# Altium PCB PowerManagement_uC.PcbDoc
Units mm, origin at the board's own origin, x right, y up, seen from the top; angles counter-clockwise.
Board outline 84 x 107 mm, 2 copper layers (Top Layer, Bottom Layer); 10 components, 68 nets, 151 pads, 76 vias.
Unrouted connection lines stored in the file: 3.
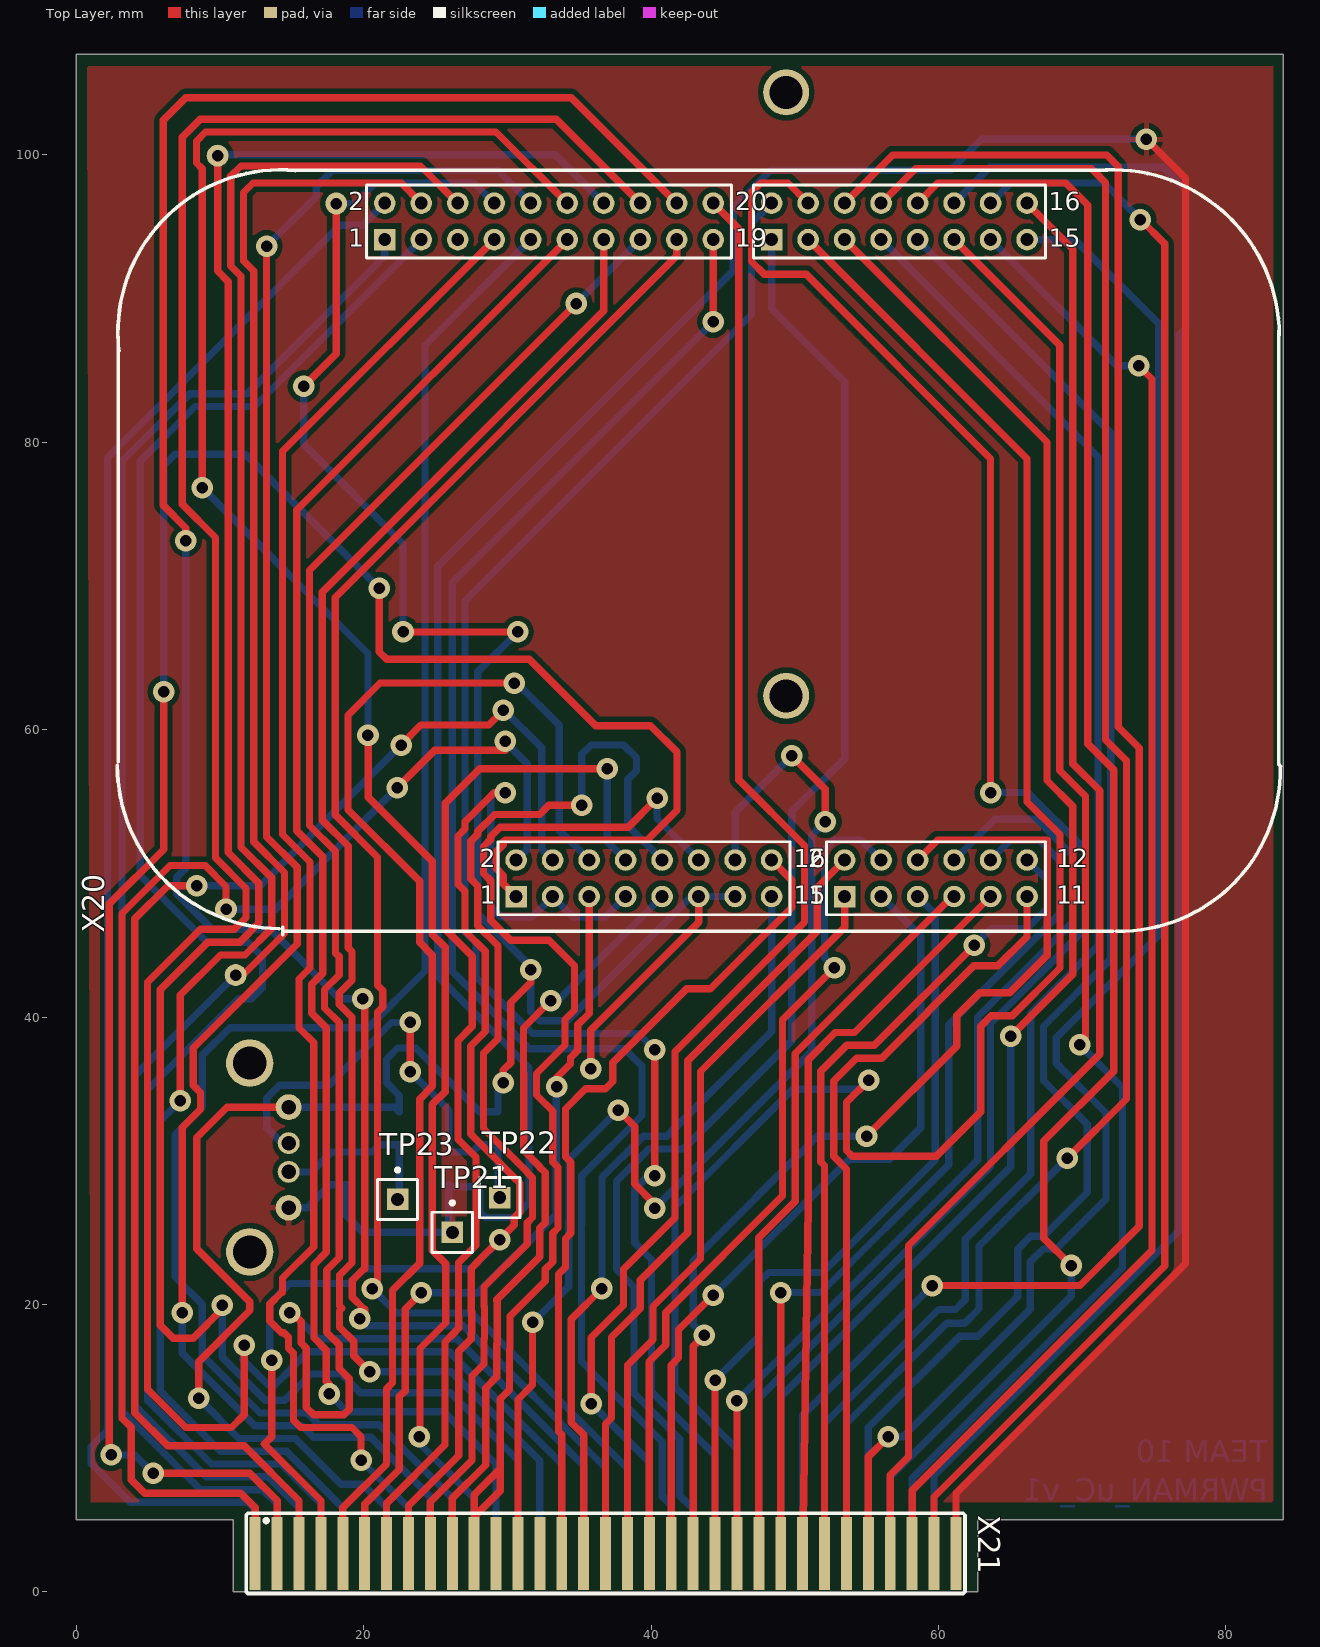
[diagram p0: Top Layer view]
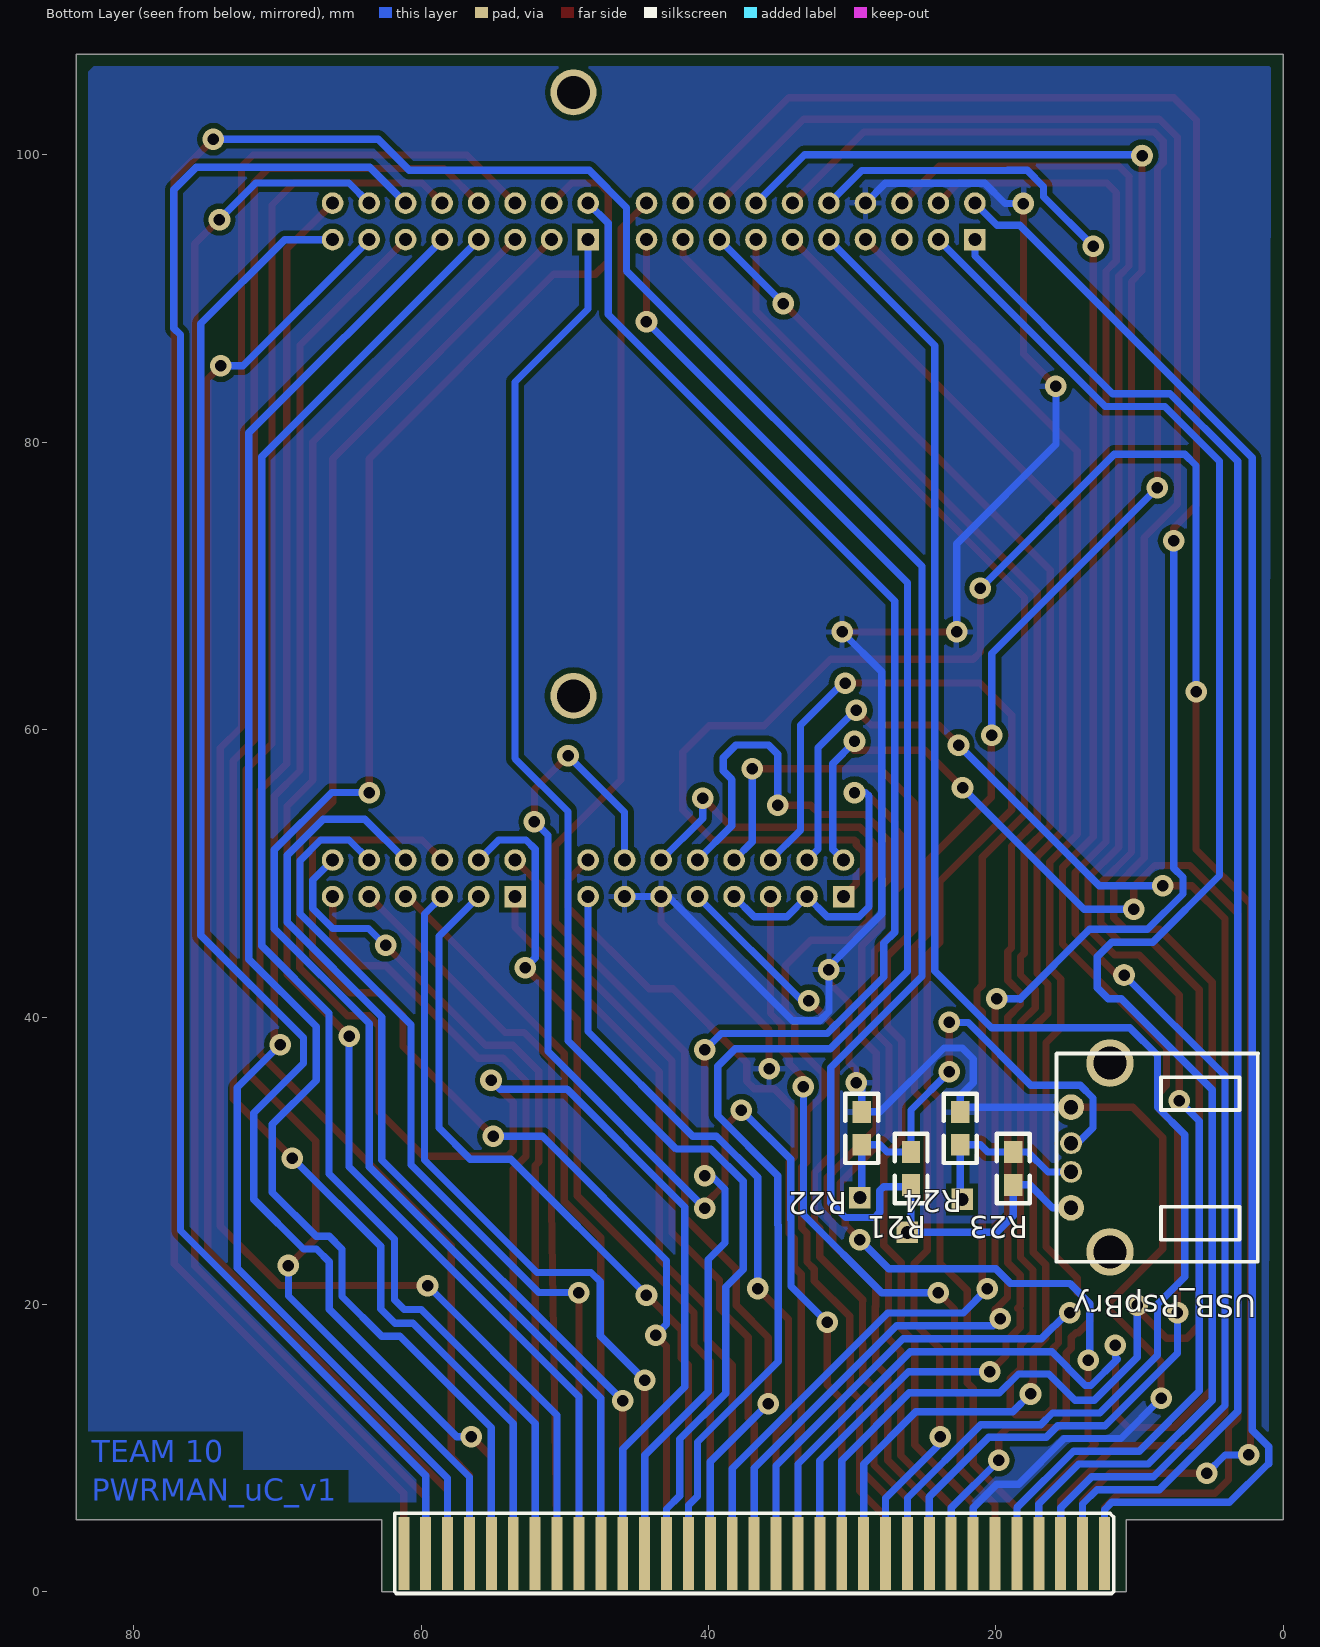
[diagram p1: Bottom Layer view, seen from below]

## Layer stack, top to bottom
Top Solder: solder mask 0.0102, Solder Resist, Dk 3.5
Top Layer: signal copper 0.0356
Dielectric 1: dielectric 0.32, FR-4, Dk 4.8
Bottom Layer: signal copper 0.0356
Bottom Solder: solder mask 0.0102, Solder Resist, Dk 3.5

## Board outline
0,5 0,107 84,107 84,5 62.738,5 62.738,0 10.922,0 10.922,5

## Design rules (kind name [scope] priority, off if disabled: settings)
Clearance [All] p1: gap=0.381
HoleToHoleClearance [All] p1: gap=0.381 allowstackedmicrovias=TRUE
PolygonConnect [All] p1: connectstyle=Relief reliefconductorwidth=0.381 reliefentries=4 polygonreliefangle="90 Angle" airgapwidth=0.381
RoomDefinition PowerManagement_uC [InComponentClass('PowerManagement_uC')] p1: confinementstyle=ConfineIn formatcopy=TRUE lockcomponents=FALSE outline 0.127,-0.508 84.127,-0.508 84.127,107 0.127,107
RoutingVias [All] p1: holewidth=0.762 width=1.524 viastyle="Through Hole" minholewidth=0.762 minwidth=1.524 maxholewidth=0.889 maxwidth=2.032
SolderMaskExpansion [All] p1: expansion=0.102
UnpouredPolygon [All] p1: allowunpoured=FALSE
Width [All] p1: maxlimit=0.762 minlimit=0.254 preferedwidth=0.508
28 further rules are at their usual default settings.

## Components (designator, comment, footprint, x,y, rotation, side; value= is the part's Value field where it differs from the comment)
R21 "3k3" 0805 25.908,30.607 r270 bottom
R22 "2k2" 0805 29.337,33.401 r270 bottom
R23 "1k8" 0805 18.796,30.607 r270 bottom
R24 "2k2" 0805 22.479,33.401 r270 bottom
TP21 "" PIN1 26.162,25.019 r0 top
TP22 "" PIN1 29.464,27.432 r0 top
TP23 "" PIN1 22.352,27.305 r0 top
USB_RspBry "USB_A" USB_A 12.065,30.226 r0 bottom
X20 "KL25Z" "Freedom KL25Z Headerarray" 66.167,48.387 r90 top
X21 "PCB_CON_66" PCB_CON_66_PLUG 11.938,5.334 r270 top

## Footprints (in the part's own frame and the unit in brackets; to place one, negate y for a bottom-side part, rotate by r counter-clockwise, add the part's x,y. Pads: shape width x height; smd on the part's side, far side on the other; paste and mask are expansions set on the pad)
0805 [mil]
  rect 60x50 smd: 1(0,0) 2(90,0)
  silkscreen extent -50,-45 140,45
"Freedom KL25Z Headerarray" [mm] "Headerarray KL25Z Shield"
  rect 1.5x1.5 hole 0.9: 1(0,35.56) 17(0,12.7) 29(45.72,44.704) 49(45.72,17.78)
  round 1.5 hole 0.9: 2(2.54,35.56) 3(0,33.02) 4(2.54,33.02) 5(0,30.48) 6(2.54,30.48) 7(0,27.94) 8(2.54,27.94) 9(0,25.4) 10(2.54,25.4) 11(0,22.86) 12(2.54,22.86) 13(0,20.32) 14(2.54,20.32) 15(0,17.78) 16(2.54,17.78) 18(2.54,12.7) 19(0,10.16) 20(2.54,10.16) 21(0,7.62) 22(2.54,7.62) 23(0,5.08) 24(2.54,5.08) 25(0,2.54) 26(2.54,2.54) 27(0,0) 28(2.54,0) 30(48.26,44.704) 31(45.72,42.164) 32(48.26,42.164) 33(45.72,39.624) 34(48.26,39.624) 35(45.72,37.084) 36(48.26,37.084) 37(45.72,34.544) 38(48.26,34.544) 39(45.72,32.004) 40(48.26,32.004) 41(45.72,29.464) 42(48.26,29.464) 43(45.72,26.924) 44(48.26,26.924) 45(45.72,24.384) 46(48.26,24.384) 47(45.72,21.844) 48(48.26,21.844) 50(48.26,17.78) 51(45.72,15.24) 52(48.26,15.24) 53(45.72,12.7) 54(48.26,12.7) 55(45.72,10.16) 56(48.26,10.16) 57(45.72,7.62) 58(48.26,7.62) 59(45.72,5.08) 60(48.26,5.08) 61(45.72,2.54) 62(48.26,2.54) 63(45.72,0) 64(48.26,0)
  silkscreen extent -2.67,-17.65 50.58,63.32
PCB_CON_66_PLUG [mil] "This PCB plug is going to be plugged into a PCB jack"
  rect 200x30 smd: 1(105,20) 2(105,80) 3(105,140) 4(105,200) 5(105,260) 6(105,320) 7(105,380) 8(105,440) 9(105,500) 10(105,560) 11(105,620) 12(105,680) 13(105,740) 14(105,800) 15(105,860) 16(105,920) 17(105,980) 18(105,1040) 19(105,1100) 20(105,1160) 21(105,1220) 22(105,1280) 23(105,1340) 24(105,1400) 25(105,1460) 26(105,1520) 27(105,1580) 28(105,1640) 29(105,1700) 30(105,1760) 31(105,1820) 32(105,1880) 33(105,1940)
  rect 200x30 smd far side: 34(105,1940) 35(105,1880) 36(105,1820) 37(105,1760) 38(105,1700) 39(105,1640) 40(105,1580) 41(105,1520) 42(105,1460) 43(105,1400) 44(105,1340) 45(105,1280) 46(105,1220) 47(105,1160) 48(105,1100) 49(105,1040) 50(105,980) 51(105,920) 52(105,860) 53(105,800) 54(105,740) 55(105,680) 56(105,620) 57(105,560) 58(105,500) 59(105,440) 60(105,380) 61(105,320) 62(105,260) 63(105,200) 64(105,140) 65(105,80) 66(105,20)
  silkscreen extent -5,-5 215,1965
PIN1 [mm] "Connector; Plug"
  rect 1.5x1.5 hole 0.9: 1(0,0)
  silkscreen extent -1.4,-1.4 1.4,2.17
USB_A [mm] "USB A jack print mounted"
  round 1.8 hole 1: 1(2.71,3.5) 4(2.71,-3.5)
  round 1.524 hole 1: 2(2.71,1) 3(2.71,-1)
  round 3.3 hole 2.3: ""(0,-6.57) ""(0,6.57)
  silkscreen extent -10.3,-7.25 3.72,7.25

## Part data
R21 R22 R23 R24: library part R?, "Normaler Widerstand"
TP21 TP22 TP23: library part Socket
X20: library part "Freedom KL25Z Header", "FRDM KL25Z Shield"
X21: "Connects a PCB with another. This scheme is either jack or plug, depends on footprint"

## Free pads (board coordinates)
  round 1.524 hole 0.8: 1(11.084,42.926) 3(9.83,99.949)
  round 3.2 hole 2.3: ""(49.403,62.357) ""(49.403,104.357)

## Via types
v1: diameter 1.5, hole 0.8, Top Layer to Bottom Layer, 76 vias

## Nets (pads, with @x,y where several pads share a name; then routed paths per layer and width w, separated by ;. In a path a pad name is that pad's centre, name@x,y a point inside that pad or via, vN(x,y) a via of type N, cw(c..) or ccw(c..) an arc to the next point about the centre after c; other vN are vias at no path point)
GND: R22.1 R24.1 USB_RspBry.4 X20.11 X20.13 X20.36 X21.12 X21.14 X21.34 X21.60 | length 196.8
  Top Layer w0.508: v1(8.509,13.462) 8.509,16.02 12.065,19.576 12.065,20.193 8.382,23.876 8.382,31.623 10.485,33.726 USB_RspBry.4 ; v1(15.824,83.896) 18.085,86.157 v1(18.085,96.622) ; v1(22.733,66.802) v1(30.709,66.802) ; v1(29.718,35.433) 29.718,36.322 30.226,36.83 30.226,41.008 31.623,42.405 v1(31.623,43.307) ; v1(35.789,36.398) 35.789,39.091 43.307,46.609 X20.11
  Bottom Layer w0.508: v1(8.509,13.462) 11.303,10.668 15.24,10.668 18.415,7.493 19.939,7.493 21.59,5.842 X21.60 ; USB_RspBry.4 22.154,33.726 R24.1 22.479,34.544 21.59,35.433 21.59,37.084 22.352,37.846 23.622,37.846 28.067,33.401 R22.1 29.337,35.052 v1(29.718,35.433) v1@29.718,35.56 ; v1(15.824,83.896) 15.824,79.858 22.733,72.949 v1(22.733,66.802) ; v1(18.085,96.622) 19.369,96.622 20.779,98.032 27.698,98.032 X20.36 ; v1(30.709,66.802) 27.94,64.033 27.94,47.193 31.623,43.51 v1(31.623,43.307) 31.623,40.386 32.258,39.751 34.163,39.751 42.799,48.387 X20.11 X20.13 ; v1@35.636,36.551 v1(35.789,36.398)
NetR21_1: R21.1 R22.2 TP22.1 USB_RspBry.3 | length 33.7
  Top Layer w0.508: v1(23.241,36.195) v1(23.241,39.624)
  Bottom Layer w0.508: USB_RspBry.3 14.759,31.242 14.288,31.242 13.24,32.29 13.24,34.362 14.139,35.261 17.57,35.261 21.933,39.624 v1(23.241,39.624) ; v1(23.241,36.195) 25.908,33.528 R21.1 27.559,30.607 28.067,31.115 R22.2 29.337,27.559 TP22.1
NetR23_1: R23.1 R24.2 TP23.1 USB_RspBry.2 | length 12.4
  Bottom Layer w0.508: USB_RspBry.2 14.791,29.21 16.383,29.21 17.78,30.607 R23.1 20.574,30.607 21.082,31.115 R24.2 22.479,27.432 TP23.1
P3V3: X20.3 X20.7 X21.4 X21.8 | length 118
  Top Layer w0.508: v1(13.589,16.129) 13.589,10.795 13.081,10.287 17.018,6.35 X21.4 ; X21.8 23.114,5.982 26.619,9.487 26.619,16.739 27.483,17.602 27.483,17.983 27.508,18.009 27.508,19.482 27.483,19.507 27.483,22.504 27.94,22.962 27.94,22.987 v1(29.464,24.511) 30.48,25.527 30.48,26.05 30.849,26.419 30.849,28.445 30.48,28.814 30.48,28.829 27.444,31.865 27.444,37.985 28.448,38.989 28.448,44.59 27.051,45.987 27.051,48.753 26.555,49.249 26.555,52.605 27.051,53.101 27.051,53.594 29.083,55.626 v1(29.845,55.626)
  Bottom Layer w0.508: v1(13.589,16.129) 13.462,16.256 13.462,20.066 14.859,21.463 19.005,21.463 20.021,22.479 27.457,22.479 29.489,24.511 v1(29.464,24.511) ; v1(29.845,55.626) 29.083,55.626 28.829,55.372 28.829,47.688 29.527,46.99 31.75,46.99 X20.3 34.544,46.99 36.83,46.99 X20.7
P5-9V_VIN: X20.15 X21.16 | length 52.8
  Top Layer w0.508: X21.16 35.306,10.922 34.442,11.786 34.442,18.974 v1(36.576,21.107)
  Bottom Layer w0.508: v1(36.576,21.107) 36.576,28.846 37.973,30.243 37.99,30.243 39.446,31.699 41.097,31.699 48.387,38.989 X20.15
P5V_USB: X20.9 X21.10 | length 53.4
  Top Layer w0.508: X21.10 26.162,6.502 28.486,8.826 28.486,14.186 29.261,14.961 29.261,17.247 29.286,17.272 29.286,20.218 29.261,20.244 29.261,20.32 32.258,23.317 32.258,25.314 32.627,25.683 32.627,29.181 32.258,29.55 32.258,29.591 31.14,30.709 31.14,36.1 31.115,36.126 31.115,39.243 v1(33.02,41.148)
  Bottom Layer w0.508: v1(33.02,41.148) 33.274,41.148 33.401,41.021 X20.9
PTA1: X20.64 X21.30 | length 102.1
  Top Layer w0.508: X21.30 56.642,8.128 57.912,9.398 57.912,24.105 71.222,37.414 71.222,55.766 69.354,57.634 69.354,93.46 X20.64
PTA2: X20.62 X21.32 | length 112.3
  Top Layer w0.508: X21.32 59.69,6.603 75.755,22.668 75.755,93.815 74.066,95.504 v1(74.041,95.504)
  Bottom Layer w0.508: X20.62 65.024,98.044 71.526,98.044 74.041,95.529 v1(74.041,95.504)
PTA4: X20.56 X21.39 | length 121.8
  Top Layer w0.508: X20.56 58.42,99.06 70.637,99.06 70.908,98.79 71.624,98.073 71.624,59.301 73.088,57.837 73.088,34.303 v1(68.961,30.175)
  Bottom Layer w0.508: X21.39 53.594,11.71 60.568,18.684 61.824,18.684 62.825,19.685 62.825,24.039 v1(68.961,30.175)
PTA5: X20.54 X21.41 | length 133.6
  Top Layer w0.508: X20.54 56.82,100 71.704,100 72.513,99.191 72.513,60.19 73.977,58.726 73.977,25.438 69.85,21.311 v1(59.563,21.311)
  Bottom Layer w0.508: X21.41 50.546,12.294 v1(59.563,21.311)
PTA12: X20.58 X21.37 | length 115.7
  Top Layer w0.508: X20.58 59.944,98.044 68.859,98.044 70.383,96.52 70.383,59.022 72.2,57.206 72.2,36.233 67.335,31.369 67.335,24.613 v1(69.24,22.708)
  Bottom Layer w0.508: X21.37 56.642,7.989 69.24,20.587 v1(69.24,22.708)
PTA13: X20.48 X21.48 | length 104.4
  Top Layer w0.508: v1(35.839,13.089) 35.839,17.704 38.075,19.939 38.075,22.454 41.656,26.035 41.656,37.592 50.673,46.609 50.673,51.943 46.101,56.515 46.101,94.869 X20.48
  Bottom Layer w0.508: v1(35.839,13.089) 39.878,9.05 X21.48
PTA16: X20.39 X21.55 | length 110.3
  Top Layer w0.508: v1(17.595,13.767) 17.595,14.462 17.399,14.658 17.399,16.82 16.535,17.684 16.535,22.765 17.399,23.629 17.399,39.25 16.383,40.266 16.383,42.284 17.145,43.046 17.145,51.162 15.342,52.966 15.342,75.286 X20.39
  Bottom Layer w0.508: v1(17.595,13.767) 18.838,12.524 25.576,12.524 29.21,8.89 X21.55
PTA17: X20.37 X21.57 | length 119.7
  Bottom Layer w0.508: X21.57 26.162,6.533 21.061,11.635 16.877,11.635 16.065,12.446 12.782,12.446 8.763,16.465 8.763,20.01 6.858,21.915 6.858,31.806 8.763,33.711 8.763,37.338 10.687,39.262 20.314,39.262 24.257,43.205 24.257,86.741 X20.37
PTB0: X20.17 X21.18 | length 52
  Top Layer w0.508: X21.18 38.354,15.773 40.132,17.551 40.132,19.859 43.434,23.161 43.434,36.207 53.467,46.24 X20.17
PTB1: X20.19 X21.20 | length 55.7
  Top Layer w0.508: X21.20 41.402,15.773 41.91,16.281 41.91,18.237 v1(44.323,20.65)
  Bottom Layer w0.508: v1(44.323,20.65) 53.779,30.106 56.584,30.106 58.763,32.286 58.763,45.631 X20.19
PTB2: X20.21 X21.22 | length 54.8
  Top Layer w0.508: X21.22 v1(44.45,14.732)
  Bottom Layer w0.508: v1(44.45,14.732) 47.545,17.827 47.545,21.59 48.18,22.225 51.943,22.225 59.766,30.048 59.766,47.168 X20.21
PTB3: X20.23 X21.24 | length 51.4
  Top Layer w0.508: X21.24 47.498,24.638 50.038,27.178 50.038,37.465 60.96,48.387 X20.23
PTB8: X20.2 X21.1 | length 97
  Top Layer w0.508: v1(10.414,47.498) 10.414,49.093 8.961,50.546 6.515,50.546 3.175,47.206 3.175,12.078 3.81,11.443 3.81,7.803 4.755,6.858 11.43,6.858 12.446,5.842 X21.1 ; v1(22.327,55.956) 24.943,58.572 29.87,58.572 29.845,58.598 v1(29.845,59.182)
  Bottom Layer w0.508: v1(10.414,47.498) 13.868,47.498 v1(22.327,55.956) ; v1(29.845,59.182) 29.845,59.157 31.369,57.633 31.369,51.689 X20.2
PTB9: X20.4 X21.3 | length 95.6
  Top Layer w0.508: v1(8.382,49.149) 6.375,49.149 4.064,46.838 4.064,12.446 6.35,10.16 11.684,10.16 15.494,6.35 X21.3 ; v1(22.606,58.928) 22.606,58.953 23.978,60.325 28.702,60.325 v1(29.718,61.341)
  Bottom Layer w0.508: v1(8.382,49.149) 12.802,49.149 22.581,58.928 v1(22.606,58.928) ; v1(29.718,61.341) 29.789,61.341 32.385,58.745 32.385,51.689 X20.4
PTB10: X20.6 X21.5 | length 90.5
  Top Layer w0.508: X21.5 18.542,5.842 21.59,8.89 21.59,14.137 21.996,14.543 21.996,20.98 23.888,22.872 23.888,34.289 24.777,35.178 24.777,44.311 23.888,45.2 23.888,49.448 18.898,54.439 18.898,61.012 21.131,63.246 v1(30.48,63.246)
  Bottom Layer w0.508: v1(30.48,63.246) 30.658,63.246 33.604,60.3 33.604,53.01 X20.6
PTB11: X20.8 X21.7 | length 75.7
  Top Layer w0.508: X21.7 21.59,6.172 25.654,10.236 25.654,17.385 26.289,18.02 26.289,18.034 26.594,18.339 26.594,18.352 26.619,18.377 26.619,19.113 26.594,19.139 26.594,22.898 27.813,24.117 27.813,30.239 26.555,31.497 26.555,38.353 27.559,39.357 27.559,44.222 25.666,46.115 25.666,54.876 28.067,57.277 v1(36.957,57.277)
  Bottom Layer w0.508: v1(36.957,57.277) 36.957,52.197 X20.8
PTC0: X20.61 X21.31 | length 103.9
  Top Layer w0.508: X21.31 58.166,7.061 74.867,23.762 74.867,84.404 v1(73.939,85.331)
  Bottom Layer w0.508: X20.61 72.403,85.331 v1(73.939,85.331)
PTC1: X20.27 X21.28 | length 53.7
  Top Layer w0.508: X21.28 53.594,29.413 52.705,30.302 52.705,35.547 54.299,37.141 56.041,37.141 62.464,43.564 64.135,43.564 66.167,45.596 X20.27
PTC2: X20.25 X21.26 | length 51.8
  Top Layer w0.508: X21.26 50.927,26.797 50.927,37.021 52.825,38.919 54.159,38.919 X20.25
PTC3: X20.59 X21.36 | length 102.7
  Top Layer w0.508: X20.59 68.441,86.753 68.441,57.163 70.231,55.373 70.231,38.481 v1(69.825,38.075)
  Bottom Layer w0.508: X21.36 58.166,7.899 72.803,22.537 72.803,35.096 v1(69.825,38.075)
PTC4: X20.57 X21.38 | length 107.8
  Bottom Layer w0.508: X21.38 55.118,11.43 61.483,17.795 62.75,17.795 65.507,20.552 65.507,23.85 66.399,24.742 67.308,24.742 70.358,27.792 70.358,32.537 67.31,35.585 67.31,39.341 71.997,44.028 71.997,80.657 X20.57
PTC5: X20.55 X21.40 | length 106.3
  Bottom Layer w0.508: X21.40 52.07,11.709 60.004,19.643 61.189,19.643 61.865,20.32 61.865,24.538 66.421,29.094 66.421,40.27 71.108,44.957 71.108,79.006 X20.55
PTC6: X20.53 X21.42 | length 106.4
  Top Layer w0.508: X20.53 67.552,80.022 67.552,56.467 69.342,54.677 69.342,42.977 v1(65.024,38.659)
  Bottom Layer w0.508: X21.42 49.022,13.585 65.024,29.587 v1(65.024,38.659)
PTC7: X20.63 X21.29 | length 109.5
  Top Layer w0.508: X21.29 55.118,9.398 v1(56.515,10.795)
  Bottom Layer w0.508: v1(56.515,10.795) 57.528,10.795 66.396,19.663 66.396,22.961 67.288,23.853 68.197,23.853 71.653,27.31 71.653,33.325 68.199,36.779 68.199,38.566 75.336,45.703 75.336,88.265 69.494,94.107 X20.63
PTC8: X20.52 X21.43 | length 121.8
  Top Layer w0.508: X20.52 49.53,98.044 47.625,98.044 46.99,97.409 46.99,92.583 47.879,91.694 50.8,91.694 63.627,78.867 v1(63.627,55.626)
  Bottom Layer w0.508: X21.43 47.498,13.462 63.627,29.591 63.627,39.548 70.219,46.14 70.219,51.634 66.227,55.626 v1(63.627,55.626)
PTC9: X20.50 X21.45 | length 116.1
  Top Layer w0.508: v1(40.259,28.956) v1(40.259,37.719) v1@40.259,38.076
  Bottom Layer w0.508: v1(40.259,28.956) 39.802,28.956 38.862,28.016 38.862,24.293 40.029,23.127 40.029,13.921 44.45,9.5 X21.45 ; v1(40.259,37.719) 39.116,38.862 31.75,38.862 31.115,39.497 31.102,39.497 27.813,42.786 27.813,45.148 27.051,45.91 27.051,68.961 46.99,88.9 46.99,95.25 X20.50
PTC10: X20.51 X21.44 | length 130.5
  Top Layer w0.508: X20.51 66.167,78.867 66.167,54.991 68.453,52.705 68.453,43.409 65.126,40.081 63.652,40.081 62.941,39.37 62.941,33.401 59.842,30.302 54,30.302 53.594,30.709 53.594,34.061 v1(55.143,35.611)
  Bottom Layer w0.508: X21.44 45.974,9.938 41.656,14.256 41.656,26.784 49.847,34.976 54.508,34.976 v1(55.143,35.611)
PTC11: X20.49 X21.46 | length 103.7
  Bottom Layer w0.508: X21.46 42.926,5.757 42.003,6.68 42.003,10.628 38.811,13.819 38.811,21.209 37.592,22.428 37.592,28.575 39.827,30.81 42.24,30.81 49.784,38.354 49.784,54.305 53.467,57.988 53.467,84.201 48.387,89.281 X20.49
PTC12: X20.47 X21.47 | length 112.6
  Top Layer w0.508: v1(44.323,88.392) X20.47
  Bottom Layer w0.508: X21.47 41.402,6.02 40.767,6.655 40.767,10.419 35.154,16.033 35.154,25.502 35.179,25.527 35.179,28.956 39.37,33.147 39.37,36.576 38.144,37.802 31.54,37.802 26.162,43.18 26.162,70.231 v1(44.323,88.392)
PTC13: X20.45 X21.49 | length 113.4
  Top Layer w0.508: v1(20.599,21.082) 20.955,21.438 20.955,40.332 21.324,40.701 21.324,41.849 20.955,42.218 20.955,51.124 18.009,54.07 18.009,69.202 41.783,92.977 X20.45
  Bottom Layer w0.508: v1(20.599,21.082) 22.276,19.406 27.534,19.406 38.354,8.585 X21.49
PTC16: X20.43 X21.51 | length 135.1
  Top Layer w0.508: v1(14.859,19.431) 15.011,19.431 15.646,18.796 15.646,17.316 16.002,16.96 16.002,12.827 16.51,12.319 18.618,12.319 18.999,12.7 18.999,14.823 18.288,15.534 18.288,17.189 17.424,18.052 17.424,22.397 18.288,23.261 18.288,39.619 17.272,40.635 17.272,41.915 18.288,42.931 18.288,44.196 18.034,44.45 18.034,51.531 16.231,53.334 16.231,71.095 v1(34.798,89.662)
  Bottom Layer w0.508: v1(14.859,19.431) 15.011,19.431 16.84,17.602 26.467,17.602 35.306,8.763 X21.51 ; v1(34.798,89.662) X20.43
PTC17: X20.41 X21.53 | length 110.7
  Top Layer w0.508: v1(20.422,15.316) 19.304,16.434 19.304,17.43 18.313,18.421 18.313,19.578 18.475,19.739 18.313,19.901 18.313,22.029 19.177,22.892 19.177,39.987 18.288,40.876 18.288,41.674 19.177,42.563 19.177,44.564 18.923,44.818 18.923,51.899 17.12,53.702 17.12,69.571 36.703,89.154 X20.41
  Bottom Layer w0.508: v1(20.422,15.316) 26.086,15.316 32.258,9.144 X21.53
PTD0: X20.44 X21.52 | length 175.5
  Top Layer w0.508: v1(11.684,17.145) 11.684,12.319 10.795,11.43 7.62,11.43 4.953,14.097 4.953,42.418 8.636,46.101 10.993,46.101 11.811,46.919 11.811,48.953 9.677,51.087 9.677,73.381 7.366,75.692 7.366,101.232 8.623,102.489 33.401,102.489 X20.44
  Bottom Layer w0.508: v1(11.684,17.145) 11.684,16.312 11.557,16.185 13.391,14.351 13.787,14.351 14.986,15.55 14.986,15.597 16.103,16.713 25.959,16.713 33.782,8.89 X21.52
PTD1: X20.38 X21.58 | length 128.9
  Top Layer w0.508: v1(7.366,19.431) 7.366,32.314 8.636,33.584 8.636,34.742 8.128,35.25 8.128,37.846 15.367,45.085 15.367,50.426 13.233,52.559 v1(13.233,93.65)
  Bottom Layer w0.508: v1(7.366,19.431) 7.366,16.605 12.414,11.557 15.697,11.557 16.508,10.746 20.496,10.746 24.638,6.604 X21.58 ; v1(13.233,93.65) 16.685,97.101 16.685,97.79 17.828,98.933 19.177,98.933 19.189,98.921 29.349,98.921 X20.38
PTD2: pad.3 X20.42 X21.54 | length 156
  Top Layer w0.508: pad.3 9.83,91.923 10.566,91.186 10.566,51.455 12.7,49.321 12.7,46.551 11.361,45.212 9.144,45.212 5.842,41.91 5.842,18.542 6.731,17.653 8.128,17.653 10.16,19.685 v1(10.16,19.939)
  Bottom Layer w0.508: pad.3 9.804,99.974 9.855,100.025 33.325,100.025 X20.42 ; v1(10.16,19.939) 10.16,16.325 13.15,13.335 14.502,13.335 16.331,15.164 18.433,15.164 19.754,13.843 26.035,13.843 30.734,9.144 X21.54
PTD3: X20.40 X21.56 | length 136.7
  Top Layer w0.508: v1(8.763,76.835) 8.763,99.04 8.357,99.447 8.357,100.965 8.992,101.6 29.21,101.6 X20.40 ; v1(20.295,59.614) 20.32,59.588 20.32,55.296 24.777,50.839 24.777,45.746 25.666,44.857 25.666,34.81 24.777,33.921 24.777,23.752 25.705,22.824 25.705,18.771 25.73,18.745 23.914,16.929 23.914,10.833 v1(23.876,10.795)
  Bottom Layer w0.508: v1(8.763,76.835) 20.295,65.303 v1(20.295,59.614) ; v1(23.876,10.795) 23.876,10.325 27.686,6.515 X21.56
PTD4: X20.60 X21.35 | length 120
  Bottom Layer w0.508: X21.35 59.69,8.077 76.759,25.146 76.759,87.478 77.216,87.935 77.216,97.587 75.667,99.136 63.576,99.136 X20.60
PTD5: X20.46 X21.50 | length 161.1
  Top Layer w0.508: v1(7.62,73.152) 7.62,74.041 6.045,75.616 6.045,102.413 7.62,103.988 34.442,103.988 X20.46 ; v1(19.71,18.999) 20.066,19.355 20.066,19.685 20.021,19.685 19.202,20.503 19.202,21.661 20.021,22.479 20.066,22.479 20.066,40.743 19.685,41.124 19.836,41.275 v1(19.939,41.275)
  Bottom Layer w0.508: v1(7.62,73.152) 7.62,50.363 6.985,49.728 6.985,48.57 9.454,46.101 13.487,46.101 18.313,41.275 18.313,41.25 18.339,41.275 v1(19.939,41.275) ; v1(19.71,18.999) 20.193,18.517 26.924,18.517 36.83,8.611 X21.50
PTD6: X20.31 X21.63 | length 118.8
  Bottom Layer w0.508: X21.63 17.018,6.109 14.237,8.89 9.398,8.89 4.953,13.335 4.953,34.941 11.287,41.275 12.192,41.275 12.954,42.037 12.954,44.196 11.938,45.212 9.086,45.212 4.445,49.853 4.445,78.689 8.255,82.499 12.395,82.499 X20.31
PTD7: X20.29 X21.65 | length 108.4
  Bottom Layer w0.508: X21.65 13.97,6.109 12.967,7.112 8.636,7.112 3.175,12.573 3.175,78.676 7.887,83.388 11.887,83.388 21.463,92.964 X20.29
PTE0: pad.1 X20.32 X21.64 | length 121
  Top Layer w0.508: pad.1 11.589,42.926 14.478,45.815 14.478,50.058 12.344,52.191 12.344,91.923 11.633,92.634 11.633,97.384 12.294,98.044 22.606,98.044 X20.32
  Bottom Layer w0.508: pad.1 4.064,35.906 4.064,12.967 9.03,8.001 13.335,8.001 15.494,5.842 X21.64
PTE1: X20.30 X21.66 | length 112.9
  Bottom Layer w0.508: X21.66 12.446,5.715 11.938,6.223 3.739,6.223 1.072,8.89 1.016,8.89 1.016,10.104 2.159,11.247 2.159,78.918 18.352,95.111 19.927,95.111 X20.30
PTE2: X20.10 X21.9 | length 80.4
  Top Layer w0.508: X21.9 24.638,6.248 27.54,9.15 27.54,15.018 28.372,15.85 28.372,17.615 28.397,17.64 28.397,19.85 28.372,19.875 28.372,21.209 31.369,24.206 31.369,25.682 31.738,26.051 31.738,28.813 31.369,29.182 31.369,29.21 28.333,32.246 28.333,37.477 29.337,38.481 29.337,44.958 27.94,46.355 27.94,49.121 27.444,49.617 27.444,52.237 27.94,52.733 27.94,52.933 29.109,54.102 32.245,54.102 32.88,54.737 v1(35.179,54.737)
  Bottom Layer w0.508: v1(35.179,54.737) 35.179,58.293 35.814,58.928 38.1,58.928 38.989,58.039 38.989,57.15 38.379,56.54 38.379,53.315 X20.10
PTE3: X20.12 X21.11 | length 80.7
  Top Layer w0.508: X21.11 27.686,5.232 ; v1(40.411,55.22) 38.405,53.213 29.477,53.213 28.829,52.565 28.829,52.365 28.333,51.869 28.333,49.985 28.829,49.489 28.829,46.736 30.226,45.339 32.893,45.339 34.671,43.561 34.671,40.487 34.011,39.827 34.011,38.049 32.029,36.068 32.029,34.575 33.147,33.457 33.147,29.919 33.516,29.55 33.516,25.314 33.147,24.945 33.147,22.949 32.639,22.441 32.639,21.635 30.175,19.172 30.175,16.904 30.15,16.879 30.15,14.072 29.491,13.413 29.491,8.561 ; 27.686,5.232 27.686,6.756 29.491,8.561 ; 27.686,5.232 29.491,7.037 29.491,8.561
  Bottom Layer w0.508: v1(40.411,55.22) 40.411,53.823 X20.12
PTE4: X20.14 X21.13 | length 88.2
  Top Layer w0.508: X21.13 30.734,13.386 31.75,14.402 v1(31.75,18.745) ; v1@37.44,33.528 v1(37.719,33.528) 38.862,32.385 38.862,28.377 40.259,26.98 v1(40.259,26.695) ; v1(49.784,58.191) 52.121,55.855 v1(52.121,53.594)
  Bottom Layer w0.508: v1(31.75,18.745) 34.265,21.26 34.265,25.87 34.29,25.895 34.29,30.099 v1(37.719,33.528) ; v1(40.259,26.695) 51.181,37.617 51.181,52.654 v1(52.121,53.594) ; X20.14 45.847,54.254 v1(49.784,58.191)
PTE5: X20.16 X21.15 | length 57.7
  Top Layer w0.508: X21.15 33.782,10.947 33.553,11.176 33.553,22.098 34.036,22.581 34.036,24.577 34.405,24.946 34.405,29.918 34.036,30.287 34.036,33.606 35.431,35.001 36.83,35.001 37.338,35.509 37.338,36.83 42.482,41.974 44.133,41.974 49.784,47.625 49.784,49.53 X20.16
PTE20: X20.18 X21.17 | length 55.2
  Top Layer w0.508: X21.17 36.83,11.676 37.244,12.09 37.244,17.711 39.243,19.71 39.243,21.692 42.545,24.994 42.545,36.957 51.562,45.974 51.562,49.022 X20.18
PTE21: X20.20 X21.19 | length 59.4
  Top Layer w0.508: X21.19 39.878,16.027 41.021,17.17 41.021,19.431 49.149,27.559 49.149,39.815 v1(52.762,43.428)
  Bottom Layer w0.508: v1(52.762,43.428) 52.07,44.12 52.07,51.689 52.705,52.324 54.61,52.324 X20.20
PTE22: X20.22 X21.21 | length 73.3
  Top Layer w0.508: X21.21 42.926,17.094 v1(43.688,17.856) ; v1(54.991,31.699) 61.265,37.973 61.265,40.081 62.881,41.697 64.964,41.697 67.564,44.298 67.564,52.312 67.552,52.324 59.944,52.324 X20.22
  Bottom Layer w0.508: v1(43.688,17.856) 42.926,18.618 42.926,23.063 51.562,31.699 v1(54.991,31.699)
PTE23: X20.24 X21.23 | length 68.7
  Top Layer w0.508: X21.23 v1(45.974,13.289)
  Bottom Layer w0.508: v1(45.974,13.289) 62.738,30.053 62.738,40.005 69.33,46.597 69.33,51.266 66.824,53.772 63.932,53.772 X20.24
PTE29: X20.26 X21.25 | length 63.9
  Top Layer w0.508: X21.25 v1(49.022,20.828)
  Bottom Layer w0.508: v1(49.022,20.828) 51.818,20.828 60.706,29.716 60.706,39.458 68.441,47.193 68.441,50.888 67.005,52.324 65.024,52.324 X20.26
PTE30: X20.28 X21.27 | length 58
  Top Layer w0.508: X21.27 52.07,29.667 51.816,29.921 51.816,36.22 53.626,38.03 55.531,38.03 v1(62.484,44.983)
  Bottom Layer w0.508: v1(62.484,44.983) 63.67,46.17 66.16,46.17 67.552,47.561 67.552,49.542 X20.28
PTE31: X20.35 X21.59 | length 106.5
  Top Layer w0.508: v1(19.812,9.144) 19.812,10.795 19.177,11.43 15.621,11.43 15.113,11.938 15.113,16.592 14.757,16.948 14.757,17.709 14.433,18.034 14.28,18.034 13.462,18.852 13.462,20.01 14.28,20.828 14.351,20.828 14.351,21.838 16.51,23.997 16.51,38.227 15.494,39.243 15.494,42.652 16.256,43.414 16.256,50.794 14.351,52.699 14.351,79.375 X20.35
  Bottom Layer w0.508: v1(19.812,9.144) 23.114,5.842 X21.59
RESET/PTA20: X20.5 X21.6 | length 54.2
  Top Layer w0.508: X21.6 20.066,6.096 22.479,8.509 22.479,13.589 22.885,13.995 22.885,19.685 v1(24.003,20.803) ; v1(33.426,35.154) v1@33.643,35.37 ; v1@33.426,35.789 34.392,36.754 34.392,37.173 34.9,37.681 34.9,39.459 35.687,40.246 X20.5
  Bottom Layer w0.508: v1(24.003,20.803) 27.94,20.803 33.401,26.264 33.401,35.128 v1(33.426,35.154)
RST: 
SDA_PTD5: X20.1 X21.2 | length 155.9
  Top Layer w0.508: v1(2.413,9.525) 2.286,9.652 2.286,47.879 6.071,51.664 v1(6.071,62.636) ; v1(5.334,8.255) 12.065,8.255 13.97,6.35 X21.2 ; v1(21.082,69.85) 21.082,65.405 21.59,64.897 31.521,64.897 36.144,60.274 39.954,60.274 41.808,58.42 41.808,54.407 39.726,52.324 29.845,52.324 29.718,52.197 29.718,51.997 29.222,51.501 29.222,50.353 29.718,49.857 29.718,49.276 X20.1
  Bottom Layer w0.508: v1(2.413,9.525) 4.064,9.525 v1(5.334,8.255) ; v1(6.071,62.636) 6.071,78.384 6.858,79.172 11.735,79.172 ; 11.76,79.172 v1(21.082,69.85)
SLEEP: 
STEP_LEFT: 
STEP_RIGHT: 
VCC: 
VCC_5V: R21.2 R23.2 TP21.1 USB_RspBry.1 X21.33 | length 242.9
  Top Layer w0.508: X21.33 61.214,6.858 77.191,22.835 77.191,98.374 v1(74.473,101.092)
  Bottom Layer w0.508: USB_RspBry.1 16.058,26.726 17.653,28.321 R23.2 18.796,26.162 19.939,25.019 25.908,25.019 R21.2 26.035,28.194 27.813,28.194 28.079,27.928 28.079,26.419 28.451,26.047 30.477,26.047 31.496,27.066 31.496,36.487 25.146,42.837 25.146,71.374 45.72,91.948 45.72,96.342 48.311,98.933 60.833,98.933 62.992,101.092 v1(74.473,101.092)
VREFH: X20.34 X21.62 | length 126.4
  Top Layer w0.508: v1(7.239,34.163) 7.239,41.529 10.033,44.323 11.729,44.323 13.589,46.183 13.589,49.689 11.455,51.823 11.455,91.554 10.744,92.266 10.744,98.476 10.719,98.501 11.455,99.238 23.952,99.238 X20.34
  Bottom Layer w0.508: v1(7.239,34.163) 5.842,32.766 5.842,13.97 10.033,9.779 14.605,9.779 18.542,5.842 X21.62
pads on no net: USB_RspBry. X20.33 X21.61

## Polygon pours and split planes (outlines as drawn)
VCC_5V on Top Layer "Bottom Layer-GND" (solid, remove dead copper, pour order 6): 0.762,106.172 83.312,106.172 83.312,6.35 83.185,6.223 1.016,6.223
GND on Bottom Layer "Bottom Layer-GND" (solid, remove dead copper, pour order 4): 0.889,106.172 82.804,106.172 83.185,105.791 83.185,6.223 1.27,6.223 1.016,6.477

## Other copper
Bottom Layer:
  text "TEAM 10" at 82.931,9.017 h1.52
  text "PWRMAN_uC_v1" at 82.931,6.35 h1.52

## Silkscreen, mask and mechanical layers (free items; w line width, h text height)
Mechanical 1:
  lines w0.254: 0,5 11.049,5 11.049,0 62.611,0 62.611,5 84,5 84,107 0,107 0,5

## Text inside footprints (layer, text, board x,y; h text height)
X20: Top Overlay "2" at 50.927,50.419 h1.27; Top Overlay "1" at 50.927,47.879 h1.27; Top Overlay "1" at 68.199,47.879 h1.27; Top Overlay "1" at 69.215,47.879 h1.27; Top Overlay "12" at 68.199,50.419 h1.27; Top Overlay "16" at 49.911,50.419 h1.27; Top Overlay "15" at 49.911,47.879 h1.27; Top Overlay "1" at 28.067,47.879 h1.27; Top Overlay "2" at 28.067,50.419 h1.27; Top Overlay "16" at 67.691,96.139 h1.27; Top Overlay "15" at 67.691,93.599 h1.27; Top Overlay "1" at 45.847,93.599 h1.27; Top Overlay "2" at 45.847,96.139 h1.27; Top Overlay "2" at 18.923,96.139 h1.27; Top Overlay "1" at 18.923,93.599 h1.27; Top Overlay "19" at 45.847,93.599 h1.27; Top Overlay "20" at 45.847,96.139 h1.27